# EAGLE board Qwiic MP3-Panel (EAGLE 9.0.0), part 1 of 3
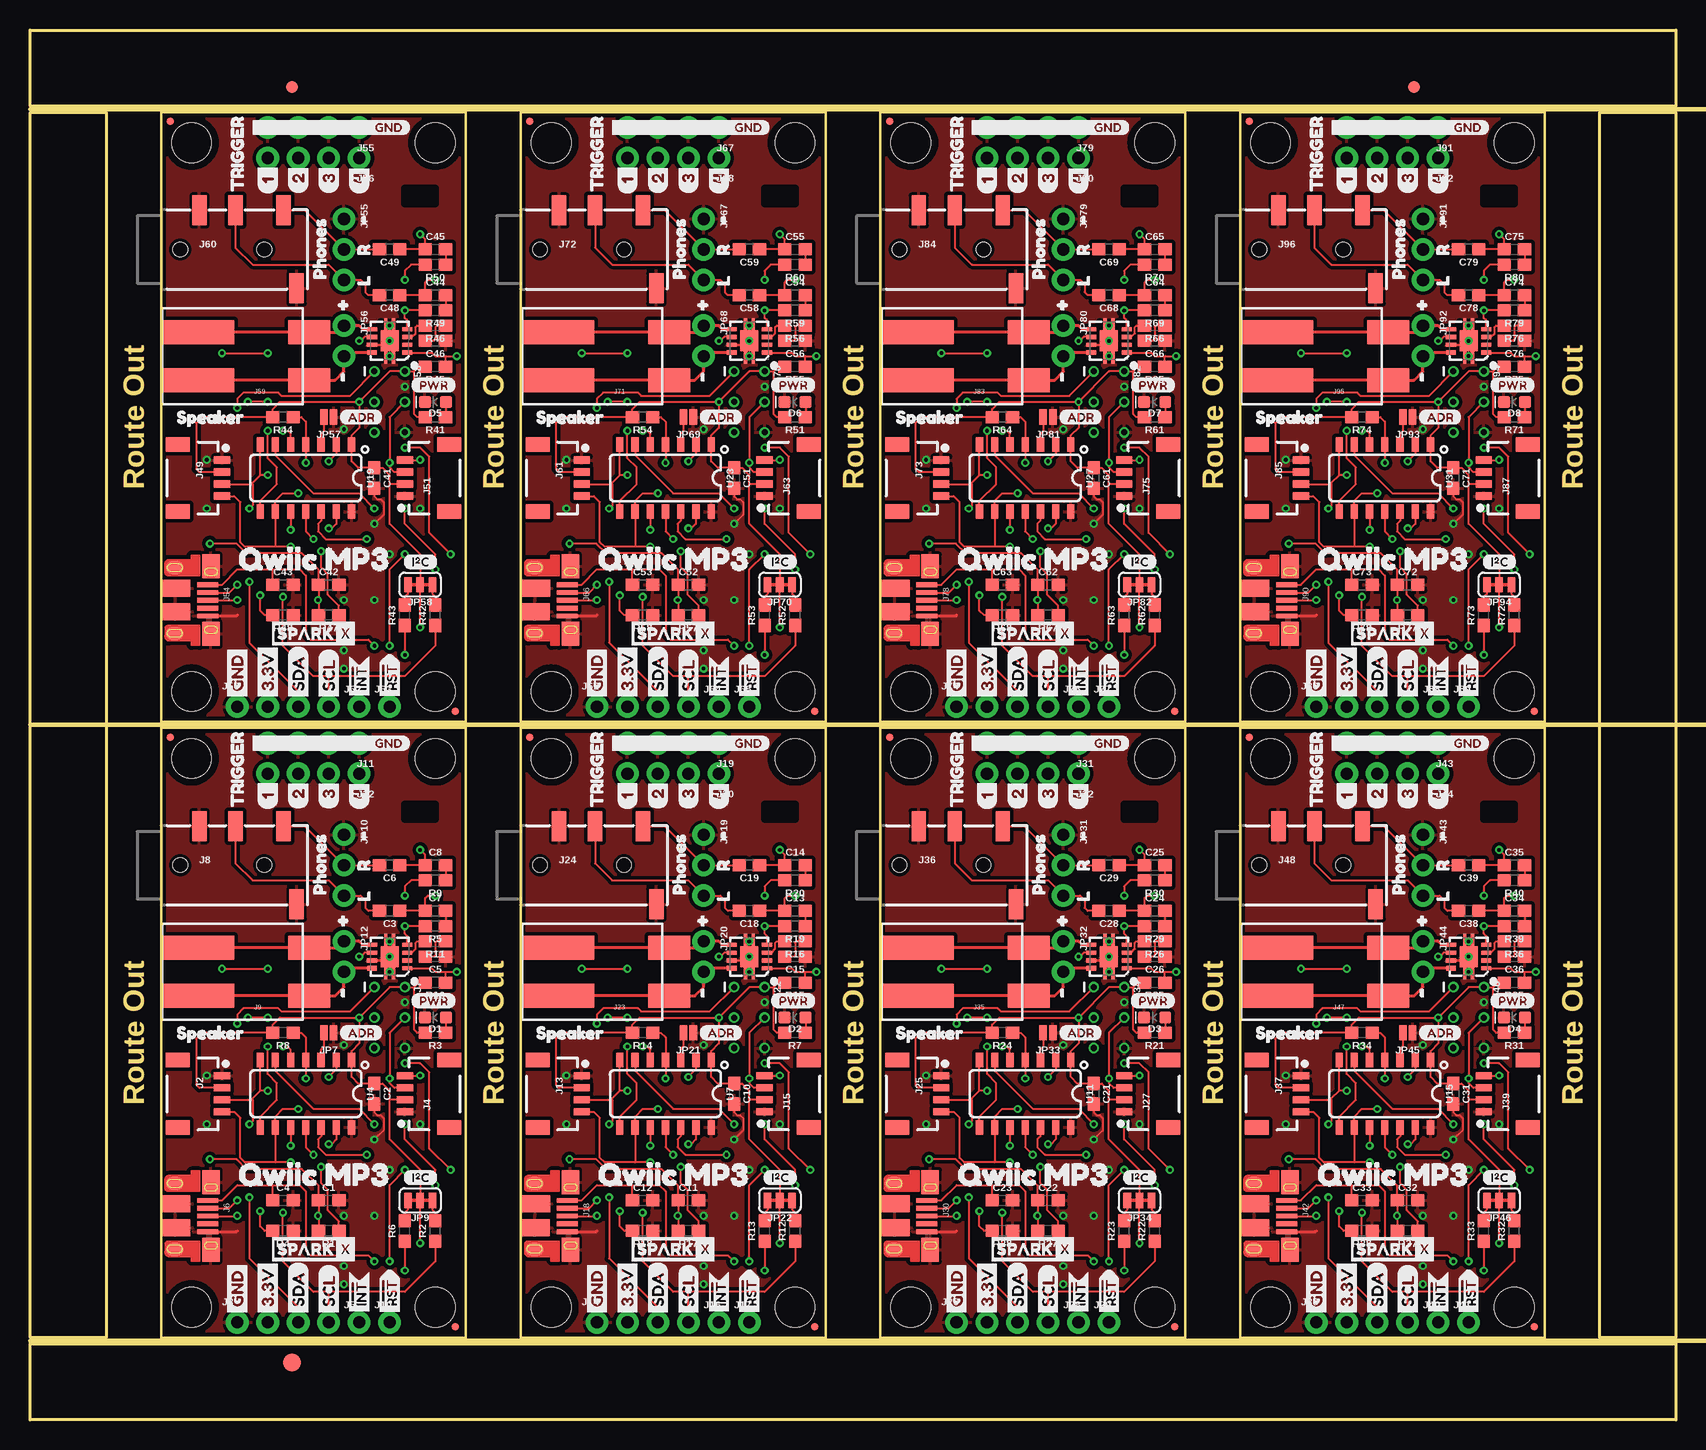
[diagram p0: board, top side]
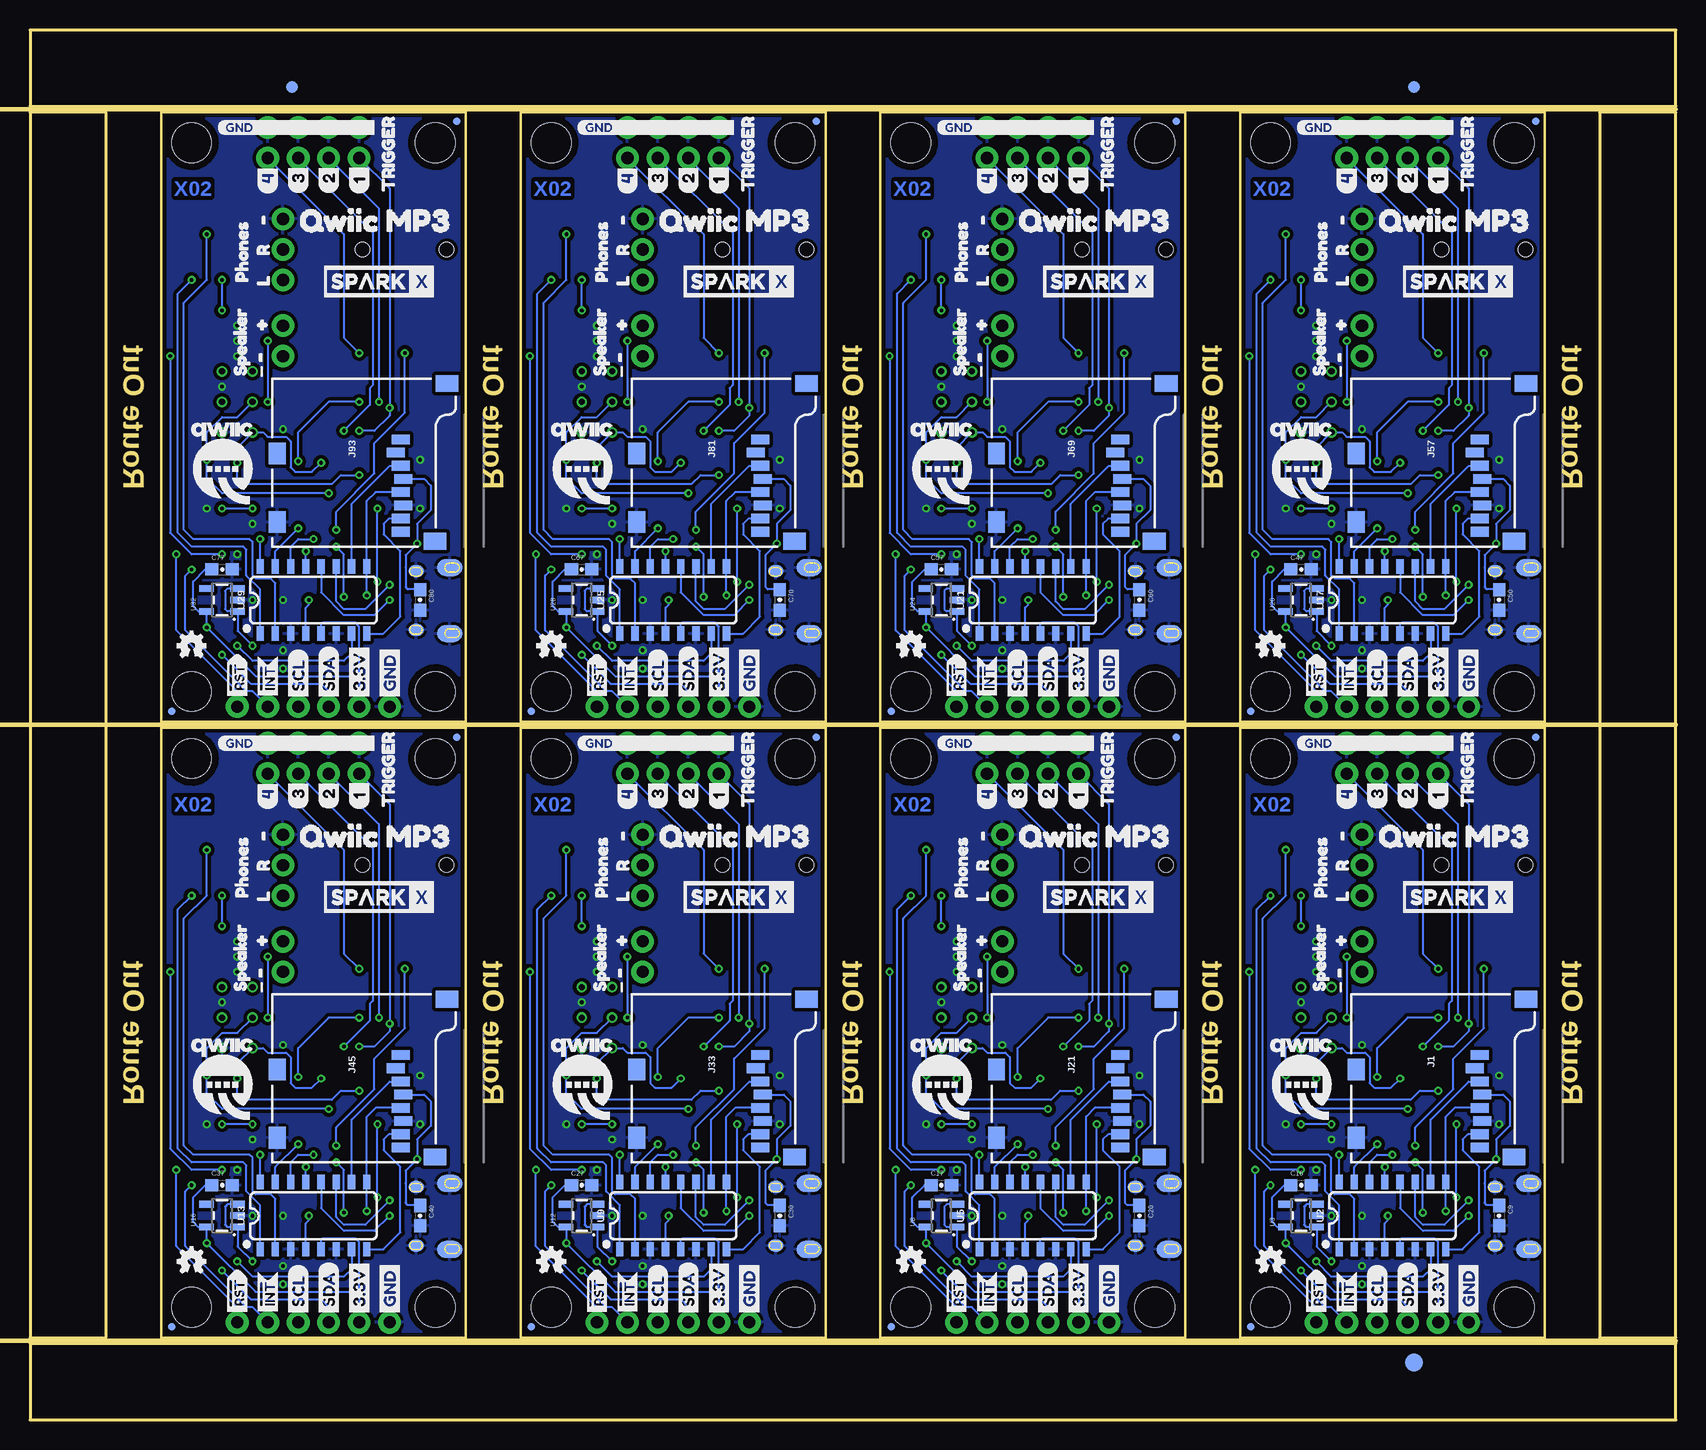
[diagram p1: board, bottom side, seen from below]

Size 137.16 x 115.82 mm. Coordinates in mm from the lower left corner, seen from the top.
Outline: 10.92,6.86 10.92,57.66 36.32,57.66 36.32,6.86 10.92,6.86
Outline: 40.89,6.86 40.89,57.66 66.29,57.66 66.29,6.86 40.89,6.86
Outline: 70.87,6.86 70.87,57.66 96.27,57.66 96.27,6.86 70.87,6.86
Outline: 100.84,6.86 100.84,57.66 126.24,57.66 126.24,6.86 100.84,6.86
Outline: 10.92,58.17 10.92,108.97 36.32,108.97 36.32,58.17 10.92,58.17
Outline: 40.89,58.17 40.89,108.97 66.29,108.97 66.29,58.17 40.89,58.17
Outline: 70.87,58.17 70.87,108.97 96.27,108.97 96.27,58.17 70.87,58.17
Outline: 100.84,58.17 100.84,108.97 126.24,108.97 126.24,58.17 100.84,58.17
Outline: 0,6.35 137.16,6.35 137.16,0 0,0 0,6.35
Outline: 130.81,108.97 137.16,108.97 137.16,6.86 130.81,6.86 130.81,108.97
Outline: 0,115.82 137.16,115.82 137.16,109.47 0,109.47 0,115.82
Outline: 0,108.97 6.35,108.97 6.35,6.86 0,6.86 0,108.97
Copper layers (1*16): Top 0.035mm / dielectric 1.5mm / Bottom 0.035mm
Design rules "SparkFun-2-layer-PCBWay-LIMIT": minimum track width 6mil, minimum drill 0.3mm, track to track 6mil, track to pad 6mil, pad to pad 6mil, via to via 6mil, smd to smd 6mil, copper to edge 6mil, drill to drill 6mil, minimum pad ring 7mil, minimum via ring 7mil, stop-mask expansion 4mil, vias tented up to drill 25mil, thermal gap 10mil
tRestrict: area 31.2,50 to 33.8,51.3; area 61.2,50 to 63.8,51.3; area 91.2,50 to 93.7,51.3; area 121.2,50 to 123.7,51.3; area 31.2,101.3 to 33.8,102.6; area 61.2,101.3 to 63.8,102.6; area 91.2,101.3 to 93.7,102.6; area 121.2,101.3 to 123.7,102.6
Milling: 3 lines

## Footprints (pad centres in the part's own frame; a part is rotated, then mirrored left to right if it is on the bottom)
0603 = smd 1.1 x 1: 1 -0.85,0; 2 0.85,0
0603-CAP = smd 1.1 x 1: 1 -0.85,0; 2 0.85,0
LED-0603 = smd 1 x 1: A -0.877,0; C 0.877,0
FIDUCIAL-1X2 = smd 1 x 1: 1 0,0
FIDUCIAL-1.5X3 = smd 1.5 x 1.5: 1 0,0
MICRO-SD-SOCKET = smd 1.8 x 1.4: CD1 -2.05,0.4; CD2 -7.75,0.4 | smd 0.8 x 1.5: CS -7.84,10.3; DI -6.74,10.7; DO -2.34,10.7; GND -3.44,10.9; RSV1 -8.94,10.7; RSV2 -1.24,10.7; SCLK -4.54,10.7; VCC -5.64,10.9 | smd 1.4 x 1.9: GND1 -13.6,14.55; GND3 -0.45,13.55
1X04_1MM_RA = smd 0.6 x 1.35: 1 -1.5,0; 2 -0.5,0; 3 0.5,0; 4 1.5,0 | smd 1.2 x 2: NC1 2.8,-3.675; NC2 -2.8,-3.675
1X04_NO_SILK = drill 1.016 pad 1.88: 1 0,0; 2 2.54,0; 3 5.08,0; 4 7.62,0
1X01_NO_SILK = drill 1.016 pad 1.88: 1 0,0
USB-MICROB-PTH-MILL = smd 0.4 x 1.75: D+ 0.031,1.331; D- -0.619,1.331; GND 1.331,1.331; ID 0.681,1.331; VBUS -1.269,1.331 | smd 2 x 1.46: SHIELD -2.794,1.606; SHIELD2 2.831,1.606 | smd 1.425 x 2.5: SHIELD3 -0.979,-1.349; SHIELD4 0.996,-1.352 | smd 1.4 x 2.1 bottom: SHIELD5 -2.7,-1.2; SHIELD7 2.8,-1.2 | smd 1.1 x 1.5: SHIELD6 2.8,-1.4; SHIELD8 -2.7,-1.4 | smd 1 x 1.3 bottom: SHIELD9 -2.4,1.6; SHIELD10 2.5,1.6
2X3_TEST_POINTS = drill 0.508: 1 -2.54,-1.27; 2 -2.54,1.27; 3 0,-1.27; 4 0,1.27; 5 2.54,-1.27; 6 2.54,1.27
AUDIO_JACK_3.5MM_TRRS_SMD_RA = smd 1.2 x 2.5: EARTH 11.3,-3.25; RING1 6.2,3.25; RING2 3.2,3.25; TIP 10.2,3.25 | hole 1.2: 1.6,0; 8.6,0
1X02_POKEHOME = smd 3.5 x 2: P1 5.25,2; P2 5.25,-2 | smd 6 x 2: P3 -4,2; P4 -4,-2
MICRO-FIDUCIAL = smd 0.635 x 0.635: 1 0,0
STAND-OFF = hole 3.302: 0,0
SMT-JUMPER_2_NO_NO-SILK = smd 0.635 x 1.27: 1 -0.406,0; 2 0.406,0
SMT-JUMPER_3_2-NC_TRACE_SILK = smd 0.635 x 1.27: 1 -1.016,0; 2 0,0; 3 1.016,0
1X03_NO_SILK = drill 1.016 pad 1.88: 1 0,0; 2 2.54,0; 3 5.08,0
1X02_NO_SILK = drill 1.016 pad 1.88: 1 0,0; 2 2.54,0
QFN-8_PAD = smd 0.35 x 0.85: 1 -0.975,-1.475; 2 -0.325,-1.475; 3 0.325,-1.475; 4 0.975,-1.475; 5 0.975,1.475; 6 0.325,1.475; 7 -0.325,1.475; 8 -0.975,1.475 | smd 1.75 x 1.5: 9 0,0 | smd 1.025 x 0.28: 10 -1.387,-0.325; 11 1.387,-0.325; 12 1.387,0.325; 13 -1.387,0.325
SO16 = smd 0.6 x 1.2: 1 -4.445,-2.8; 2 -3.175,-2.8; 3 -1.905,-2.8; 4 -0.635,-2.8; 5 0.635,-2.8; 6 1.905,-2.8; 7 3.175,-2.8; 8 4.445,-2.8; 9 4.445,2.8; 10 3.175,2.8; 11 1.905,2.8; 12 0.635,2.8; 13 -0.635,2.8; 14 -1.905,2.8; 15 -3.175,2.8; 16 -4.445,2.8
SOT23-5 = smd 0.55 x 1.2: 1 -0.95,-1.3; 2 0,-1.3; 3 0.95,-1.3; 4 0.95,1.3; 5 -0.95,1.3
SO14 = smd 0.6 x 1.2: 1 -3.175,-2.8; 2 -1.905,-2.8; 3 -0.635,-2.8; 4 0.635,-2.8; 5 1.905,-2.8; 6 3.175,-2.8; 7 4.445,-2.8; 8 4.445,2.8; 9 3.175,2.8; 10 1.905,2.8; 11 0.635,2.8; 12 -0.635,2.8; 13 -1.905,2.8; 14 -3.175,2.8

## Placement (x,y rotation side)
C1  10uF  [0603]  24.89,18.29 0 top
C2  0.1uF  [0603]  28.7,27.18 270 top
C3  10uF  [0603]  29.97,42.42 180 top
C4  1.0uF  [0603]  21.08,18.29 0 top
C5  1.0uF  [0603]  33.78,38.61 180 top
C6  10uF  [0603]  29.97,46.23 180 top
C7  0.1uF  [0603]  33.78,42.42 0 top
C8  0.1uF  [0603]  33.78,46.23 0 top
C9  1.0uF  [0603-CAP]  14.73,17.02 270 bottom
C10  0.1uF  [0603]  58.67,27.18 270 top
C11  10uF  [0603]  54.86,18.29 0 top
C12  1.0uF  [0603]  51.05,18.29 0 top
C13  0.1uF  [0603]  63.75,42.42 0 top
C14  0.1uF  [0603]  63.75,46.23 0 top
C15  1.0uF  [0603]  63.75,38.61 180 top
C16  1.0uF  [0603-CAP]  31.24,19.56 0 bottom
C17  1.0uF  [0603-CAP]  61.21,19.56 0 bottom
C18  10uF  [0603]  59.94,42.42 180 top
C19  10uF  [0603]  59.94,46.23 180 top
C20  1.0uF  [0603-CAP]  44.7,17.02 270 bottom
C21  0.1uF  [0603]  88.65,27.18 270 top
C22  10uF  [0603]  84.84,18.29 0 top
C23  1.0uF  [0603]  81.03,18.29 0 top
C24  0.1uF  [0603]  93.73,42.42 0 top
C25  0.1uF  [0603]  93.73,46.23 0 top
C26  1.0uF  [0603]  93.73,38.61 180 top
C27  1.0uF  [0603-CAP]  91.19,19.56 0 bottom
C28  10uF  [0603]  89.92,42.42 180 top
C29  10uF  [0603]  89.92,46.23 180 top
C30  1.0uF  [0603-CAP]  74.68,17.02 270 bottom
C31  0.1uF  [0603]  118.62,27.18 270 top
C32  10uF  [0603]  114.81,18.29 0 top
C33  1.0uF  [0603]  111,18.29 0 top
C34  0.1uF  [0603]  123.7,42.42 0 top
C35  0.1uF  [0603]  123.7,46.23 0 top
C36  1.0uF  [0603]  123.7,38.61 180 top
C37  1.0uF  [0603-CAP]  121.16,19.56 0 bottom
C38  10uF  [0603]  119.89,42.42 180 top
C39  10uF  [0603]  119.89,46.23 180 top
C40  1.0uF  [0603-CAP]  104.65,17.02 270 bottom
C41  0.1uF  [0603]  28.7,78.49 270 top
C42  10uF  [0603]  24.89,69.6 0 top
C43  1.0uF  [0603]  21.08,69.6 0 top
C44  0.1uF  [0603]  33.78,93.73 0 top
C45  0.1uF  [0603]  33.78,97.54 0 top
C46  1.0uF  [0603]  33.78,89.92 180 top
C47  1.0uF  [0603-CAP]  31.24,70.87 0 bottom
C48  10uF  [0603]  29.97,93.73 180 top
C49  10uF  [0603]  29.97,97.54 180 top
C50  1.0uF  [0603-CAP]  14.73,68.33 270 bottom
C51  0.1uF  [0603]  58.67,78.49 270 top
C52  10uF  [0603]  54.86,69.6 0 top
C53  1.0uF  [0603]  51.05,69.6 0 top
C54  0.1uF  [0603]  63.75,93.73 0 top
C55  0.1uF  [0603]  63.75,97.54 0 top
C56  1.0uF  [0603]  63.75,89.92 180 top
C57  1.0uF  [0603-CAP]  61.21,70.87 0 bottom
C58  10uF  [0603]  59.94,93.73 180 top
C59  10uF  [0603]  59.94,97.54 180 top
C60  1.0uF  [0603-CAP]  44.7,68.33 270 bottom
C61  0.1uF  [0603]  88.65,78.49 270 top
C62  10uF  [0603]  84.84,69.6 0 top
C63  1.0uF  [0603]  81.03,69.6 0 top
C64  0.1uF  [0603]  93.73,93.73 0 top
C65  0.1uF  [0603]  93.73,97.54 0 top
C66  1.0uF  [0603]  93.73,89.92 180 top
C67  1.0uF  [0603-CAP]  91.19,70.87 0 bottom
C68  10uF  [0603]  89.92,93.73 180 top
C69  10uF  [0603]  89.92,97.54 180 top
C70  1.0uF  [0603-CAP]  74.68,68.33 270 bottom
C71  0.1uF  [0603]  118.62,78.49 270 top
C72  10uF  [0603]  114.81,69.6 0 top
C73  1.0uF  [0603]  111,69.6 0 top
C74  0.1uF  [0603]  123.7,93.73 0 top
C75  0.1uF  [0603]  123.7,97.54 0 top
C76  1.0uF  [0603]  123.7,89.92 180 top
C77  1.0uF  [0603-CAP]  121.16,70.87 0 bottom
C78  10uF  [0603]  119.89,93.73 180 top
C79  10uF  [0603]  119.89,97.54 180 top
C80  1.0uF  [0603-CAP]  104.65,68.33 270 bottom
D1  RED  [LED-0603]  33.78,33.53 180 top
D2  RED  [LED-0603]  63.75,33.53 180 top
D3  RED  [LED-0603]  93.73,33.53 180 top
D4  RED  [LED-0603]  123.7,33.53 180 top
D5  RED  [LED-0603]  33.78,84.84 180 top
D6  RED  [LED-0603]  63.75,84.84 180 top
D7  RED  [LED-0603]  93.73,84.84 180 top
D8  RED  [LED-0603]  123.7,84.84 180 top
E$1  [FIDUCIAL-1X2]  21.84,111.06 0 top
E$2  [FIDUCIAL-1X2]  21.84,111.06 0 bottom
E$3  [FIDUCIAL-1X2]  115.32,111.06 0 top
E$4  [FIDUCIAL-1X2]  115.32,111.06 0 bottom
E$5  [FIDUCIAL-1.5X3]  21.84,4.76 0 top
E$6  [FIDUCIAL-1.5X3]  21.84,4.76 0 bottom
J1  MICRO-SD  [MICRO-SD-SOCKET]  27.05,21.46 270 bottom
J2  [1X04_1MM_RA]  16,27.18 270 top
J3  PTH  [1X04_NO_SILK]  17.27,8.13 0 top
J4  [1X04_1MM_RA]  31.24,27.18 90 top
J5  [1X01_NO_SILK]  27.43,8.13 0 top
J6  [USB-MICROB-PTH-MILL]  13.46,17.02 270 top
J7  ISP  [2X3_TEST_POINTS]  29.97,33.53 270 top
J8  3.5mm Audio  [AUDIO_JACK_3.5MM_TRRS_SMD_RA]  10.92,46.23 0 top
J9  Poke-Home  [1X02_POKEHOME]  18.03,37.34 0 top
J10  [1X01_NO_SILK]  29.97,8.13 0 top
J11  [1X04_NO_SILK]  27.43,56.39 180 top
J12  [1X04_NO_SILK]  27.43,53.85 180 top
J13  [1X04_1MM_RA]  45.97,27.18 270 top
J14  PTH  [1X04_NO_SILK]  47.24,8.13 0 top
J15  [1X04_1MM_RA]  61.21,27.18 90 top
J16  [1X01_NO_SILK]  57.4,8.13 0 top
J17  [1X01_NO_SILK]  59.94,8.13 0 top
J18  [USB-MICROB-PTH-MILL]  43.43,17.02 270 top
J19  [1X04_NO_SILK]  57.4,56.39 180 top
J20  [1X04_NO_SILK]  57.4,53.85 180 top
J21  MICRO-SD  [MICRO-SD-SOCKET]  57.02,21.46 270 bottom
J22  ISP  [2X3_TEST_POINTS]  59.94,33.53 270 top
J23  Poke-Home  [1X02_POKEHOME]  48.01,37.34 0 top
J24  3.5mm Audio  [AUDIO_JACK_3.5MM_TRRS_SMD_RA]  40.89,46.23 0 top
J25  [1X04_1MM_RA]  75.95,27.18 270 top
J26  PTH  [1X04_NO_SILK]  77.22,8.13 0 top
J27  [1X04_1MM_RA]  91.19,27.18 90 top
J28  [1X01_NO_SILK]  87.38,8.13 0 top
J29  [1X01_NO_SILK]  89.92,8.13 0 top
J30  [USB-MICROB-PTH-MILL]  73.41,17.02 270 top
J31  [1X04_NO_SILK]  87.38,56.39 180 top
J32  [1X04_NO_SILK]  87.38,53.85 180 top
J33  MICRO-SD  [MICRO-SD-SOCKET]  86.99,21.46 270 bottom
J34  ISP  [2X3_TEST_POINTS]  89.92,33.53 270 top
J35  Poke-Home  [1X02_POKEHOME]  77.98,37.34 0 top
J36  3.5mm Audio  [AUDIO_JACK_3.5MM_TRRS_SMD_RA]  70.87,46.23 0 top
J37  [1X04_1MM_RA]  105.92,27.18 270 top
J38  PTH  [1X04_NO_SILK]  107.19,8.13 0 top
J39  [1X04_1MM_RA]  121.16,27.18 90 top
J40  [1X01_NO_SILK]  117.35,8.13 0 top
J41  [1X01_NO_SILK]  119.89,8.13 0 top
J42  [USB-MICROB-PTH-MILL]  103.38,17.02 270 top
J43  [1X04_NO_SILK]  117.35,56.39 180 top
J44  [1X04_NO_SILK]  117.35,53.85 180 top
J45  MICRO-SD  [MICRO-SD-SOCKET]  116.97,21.46 270 bottom
J46  ISP  [2X3_TEST_POINTS]  119.89,33.53 270 top
J47  Poke-Home  [1X02_POKEHOME]  107.95,37.34 0 top
J48  3.5mm Audio  [AUDIO_JACK_3.5MM_TRRS_SMD_RA]  100.84,46.23 0 top
J49  [1X04_1MM_RA]  16,78.49 270 top
J50  PTH  [1X04_NO_SILK]  17.27,59.44 0 top
J51  [1X04_1MM_RA]  31.24,78.49 90 top
J52  [1X01_NO_SILK]  27.43,59.44 0 top
J53  [1X01_NO_SILK]  29.97,59.44 0 top
J54  [USB-MICROB-PTH-MILL]  13.46,68.33 270 top
J55  [1X04_NO_SILK]  27.43,107.7 180 top
J56  [1X04_NO_SILK]  27.43,105.16 180 top
J57  MICRO-SD  [MICRO-SD-SOCKET]  27.05,72.77 270 bottom
J58  ISP  [2X3_TEST_POINTS]  29.97,84.84 270 top
J59  Poke-Home  [1X02_POKEHOME]  18.03,88.65 0 top
J60  3.5mm Audio  [AUDIO_JACK_3.5MM_TRRS_SMD_RA]  10.92,97.54 0 top
J61  [1X04_1MM_RA]  45.97,78.49 270 top
J62  PTH  [1X04_NO_SILK]  47.24,59.44 0 top
J63  [1X04_1MM_RA]  61.21,78.49 90 top
J64  [1X01_NO_SILK]  57.4,59.44 0 top
J65  [1X01_NO_SILK]  59.94,59.44 0 top
J66  [USB-MICROB-PTH-MILL]  43.43,68.33 270 top
J67  [1X04_NO_SILK]  57.4,107.7 180 top
J68  [1X04_NO_SILK]  57.4,105.16 180 top
J69  MICRO-SD  [MICRO-SD-SOCKET]  57.02,72.77 270 bottom
J70  ISP  [2X3_TEST_POINTS]  59.94,84.84 270 top
J71  Poke-Home  [1X02_POKEHOME]  48.01,88.65 0 top
J72  3.5mm Audio  [AUDIO_JACK_3.5MM_TRRS_SMD_RA]  40.89,97.54 0 top
J73  [1X04_1MM_RA]  75.95,78.49 270 top
J74  PTH  [1X04_NO_SILK]  77.22,59.44 0 top
J75  [1X04_1MM_RA]  91.19,78.49 90 top
J76  [1X01_NO_SILK]  87.38,59.44 0 top
J77  [1X01_NO_SILK]  89.92,59.44 0 top
J78  [USB-MICROB-PTH-MILL]  73.41,68.33 270 top
J79  [1X04_NO_SILK]  87.38,107.7 180 top
J80  [1X04_NO_SILK]  87.38,105.16 180 top
J81  MICRO-SD  [MICRO-SD-SOCKET]  86.99,72.77 270 bottom
J82  ISP  [2X3_TEST_POINTS]  89.92,84.84 270 top
J83  Poke-Home  [1X02_POKEHOME]  77.98,88.65 0 top
J84  3.5mm Audio  [AUDIO_JACK_3.5MM_TRRS_SMD_RA]  70.87,97.54 0 top
J85  [1X04_1MM_RA]  105.92,78.49 270 top
J86  PTH  [1X04_NO_SILK]  107.19,59.44 0 top
J87  [1X04_1MM_RA]  121.16,78.49 90 top
J88  [1X01_NO_SILK]  117.35,59.44 0 top
J89  [1X01_NO_SILK]  119.89,59.44 0 top
J90  [USB-MICROB-PTH-MILL]  103.38,68.33 270 top
J91  [1X04_NO_SILK]  117.35,107.7 180 top
J92  [1X04_NO_SILK]  117.35,105.16 180 top
J93  MICRO-SD  [MICRO-SD-SOCKET]  116.97,72.77 270 bottom
J94  ISP  [2X3_TEST_POINTS]  119.89,84.84 270 top
J95  Poke-Home  [1X02_POKEHOME]  107.95,88.65 0 top
J96  3.5mm Audio  [AUDIO_JACK_3.5MM_TRRS_SMD_RA]  100.84,97.54 0 top
JP1  FIDUCIALUFIDUCIAL  [MICRO-FIDUCIAL]  11.68,56.9 0 bottom
JP2  FIDUCIALUFIDUCIAL  [MICRO-FIDUCIAL]  35.43,7.75 0 top
JP3  STAND-OFF  [STAND-OFF]  13.46,55.12 0 top
JP4  STAND-OFF  [STAND-OFF]  33.78,55.12 0 top
JP5  FIDUCIALUFIDUCIAL  [MICRO-FIDUCIAL]  35.43,7.75 0 bottom
JP6  FIDUCIALUFIDUCIAL  [MICRO-FIDUCIAL]  11.68,56.9 0 top
JP7  ADR  [SMT-JUMPER_2_NO_NO-SILK]  24.89,32.26 180 top
JP8  STAND-OFF  [STAND-OFF]  43.43,55.12 0 top
JP9  [SMT-JUMPER_3_2-NC_TRACE_SILK]  32.51,18.29 180 top
JP10  PTH  [1X03_NO_SILK]  26.16,48.77 270 top
JP11  STAND-OFF  [STAND-OFF]  13.46,9.4 0 top
JP12  PTH  [1X02_NO_SILK]  26.16,39.88 270 top
JP13  STAND-OFF  [STAND-OFF]  33.78,9.4 0 top
JP14  STAND-OFF  [STAND-OFF]  63.75,55.12 0 top
JP15  FIDUCIALUFIDUCIAL  [MICRO-FIDUCIAL]  65.41,7.75 0 top
JP16  FIDUCIALUFIDUCIAL  [MICRO-FIDUCIAL]  41.66,56.9 0 top
JP17  FIDUCIALUFIDUCIAL  [MICRO-FIDUCIAL]  41.66,56.9 0 bottom
JP18  FIDUCIALUFIDUCIAL  [MICRO-FIDUCIAL]  65.41,7.75 0 bottom
JP19  PTH  [1X03_NO_SILK]  56.13,48.77 270 top
JP20  PTH  [1X02_NO_SILK]  56.13,39.88 270 top
JP21  ADR  [SMT-JUMPER_2_NO_NO-SILK]  54.86,32.26 180 top
JP22  [SMT-JUMPER_3_2-NC_TRACE_SILK]  62.48,18.29 180 top
JP23  STAND-OFF  [STAND-OFF]  43.43,9.4 0 top
JP24  STAND-OFF  [STAND-OFF]  63.75,9.4 0 top
JP25  STAND-OFF  [STAND-OFF]  73.41,55.12 0 top
JP26  STAND-OFF  [STAND-OFF]  93.73,55.12 0 top
JP27  FIDUCIALUFIDUCIAL  [MICRO-FIDUCIAL]  95.38,7.75 0 top
JP28  FIDUCIALUFIDUCIAL  [MICRO-FIDUCIAL]  71.63,56.9 0 top
JP29  FIDUCIALUFIDUCIAL  [MICRO-FIDUCIAL]  71.63,56.9 0 bottom
JP30  FIDUCIALUFIDUCIAL  [MICRO-FIDUCIAL]  95.38,7.75 0 bottom
JP31  PTH  [1X03_NO_SILK]  86.11,48.77 270 top
JP32  PTH  [1X02_NO_SILK]  86.11,39.88 270 top
JP33  ADR  [SMT-JUMPER_2_NO_NO-SILK]  84.84,32.26 180 top
JP34  [SMT-JUMPER_3_2-NC_TRACE_SILK]  92.46,18.29 180 top
JP35  STAND-OFF  [STAND-OFF]  73.41,9.4 0 top
JP36  STAND-OFF  [STAND-OFF]  93.73,9.4 0 top
JP37  STAND-OFF  [STAND-OFF]  103.38,55.12 0 top
JP38  STAND-OFF  [STAND-OFF]  123.7,55.12 0 top
JP39  FIDUCIALUFIDUCIAL  [MICRO-FIDUCIAL]  125.35,7.75 0 top
JP40  FIDUCIALUFIDUCIAL  [MICRO-FIDUCIAL]  101.6,56.9 0 top
JP41  FIDUCIALUFIDUCIAL  [MICRO-FIDUCIAL]  101.6,56.9 0 bottom
JP42  FIDUCIALUFIDUCIAL  [MICRO-FIDUCIAL]  125.35,7.75 0 bottom
JP43  PTH  [1X03_NO_SILK]  116.08,48.77 270 top
JP44  PTH  [1X02_NO_SILK]  116.08,39.88 270 top
JP45  ADR  [SMT-JUMPER_2_NO_NO-SILK]  114.81,32.26 180 top
JP46  [SMT-JUMPER_3_2-NC_TRACE_SILK]  122.43,18.29 180 top
JP47  STAND-OFF  [STAND-OFF]  103.38,9.4 0 top
JP48  STAND-OFF  [STAND-OFF]  123.7,9.4 0 top
JP49  STAND-OFF  [STAND-OFF]  13.46,106.43 0 top
JP50  STAND-OFF  [STAND-OFF]  33.78,106.43 0 top
JP51  FIDUCIALUFIDUCIAL  [MICRO-FIDUCIAL]  35.43,59.05 0 top
JP52  FIDUCIALUFIDUCIAL  [MICRO-FIDUCIAL]  11.68,108.2 0 top
JP53  FIDUCIALUFIDUCIAL  [MICRO-FIDUCIAL]  11.68,108.2 0 bottom
JP54  FIDUCIALUFIDUCIAL  [MICRO-FIDUCIAL]  35.43,59.05 0 bottom
JP55  PTH  [1X03_NO_SILK]  26.16,100.08 270 top
JP56  PTH  [1X02_NO_SILK]  26.16,91.19 270 top
JP57  ADR  [SMT-JUMPER_2_NO_NO-SILK]  24.89,83.57 180 top
JP58  [SMT-JUMPER_3_2-NC_TRACE_SILK]  32.51,69.6 180 top
JP59  STAND-OFF  [STAND-OFF]  13.46,60.71 0 top
JP60  STAND-OFF  [STAND-OFF]  33.78,60.71 0 top
JP61  STAND-OFF  [STAND-OFF]  43.43,106.43 0 top
JP62  STAND-OFF  [STAND-OFF]  63.75,106.43 0 top
JP63  FIDUCIALUFIDUCIAL  [MICRO-FIDUCIAL]  65.41,59.05 0 top
JP64  FIDUCIALUFIDUCIAL  [MICRO-FIDUCIAL]  41.66,108.2 0 top
JP65  FIDUCIALUFIDUCIAL  [MICRO-FIDUCIAL]  41.66,108.2 0 bottom
JP66  FIDUCIALUFIDUCIAL  [MICRO-FIDUCIAL]  65.41,59.05 0 bottom
JP67  PTH  [1X03_NO_SILK]  56.13,100.08 270 top
JP68  PTH  [1X02_NO_SILK]  56.13,91.19 270 top
JP69  ADR  [SMT-JUMPER_2_NO_NO-SILK]  54.86,83.57 180 top
JP70  [SMT-JUMPER_3_2-NC_TRACE_SILK]  62.48,69.6 180 top
JP71  STAND-OFF  [STAND-OFF]  43.43,60.71 0 top
JP72  STAND-OFF  [STAND-OFF]  63.75,60.71 0 top
JP73  STAND-OFF  [STAND-OFF]  73.41,106.43 0 top
JP74  STAND-OFF  [STAND-OFF]  93.73,106.43 0 top
JP75  FIDUCIALUFIDUCIAL  [MICRO-FIDUCIAL]  95.38,59.05 0 top
JP76  FIDUCIALUFIDUCIAL  [MICRO-FIDUCIAL]  71.63,108.2 0 top
JP77  FIDUCIALUFIDUCIAL  [MICRO-FIDUCIAL]  71.63,108.2 0 bottom
JP78  FIDUCIALUFIDUCIAL  [MICRO-FIDUCIAL]  95.38,59.05 0 bottom
JP79  PTH  [1X03_NO_SILK]  86.11,100.08 270 top
JP80  PTH  [1X02_NO_SILK]  86.11,91.19 270 top
JP81  ADR  [SMT-JUMPER_2_NO_NO-SILK]  84.84,83.57 180 top
JP82  [SMT-JUMPER_3_2-NC_TRACE_SILK]  92.46,69.6 180 top
JP83  STAND-OFF  [STAND-OFF]  73.41,60.71 0 top
JP84  STAND-OFF  [STAND-OFF]  93.73,60.71 0 top
JP85  STAND-OFF  [STAND-OFF]  103.38,106.43 0 top
JP86  STAND-OFF  [STAND-OFF]  123.7,106.43 0 top
JP87  FIDUCIALUFIDUCIAL  [MICRO-FIDUCIAL]  125.35,59.05 0 top
JP88  FIDUCIALUFIDUCIAL  [MICRO-FIDUCIAL]  101.6,108.2 0 top
JP89  FIDUCIALUFIDUCIAL  [MICRO-FIDUCIAL]  101.6,108.2 0 bottom
JP90  FIDUCIALUFIDUCIAL  [MICRO-FIDUCIAL]  125.35,59.05 0 bottom
JP91  PTH  [1X03_NO_SILK]  116.08,100.08 270 top
JP92  PTH  [1X02_NO_SILK]  116.08,91.19 270 top
JP93  ADR  [SMT-JUMPER_2_NO_NO-SILK]  114.81,83.57 180 top
JP94  [SMT-JUMPER_3_2-NC_TRACE_SILK]  122.43,69.6 180 top
JP95  STAND-OFF  [STAND-OFF]  103.38,60.71 0 top
JP96  STAND-OFF  [STAND-OFF]  123.7,60.71 0 top
LOGO1  OSHW-LOGOMINI  [OSHW-LOGO-MINI]  33.78,13.21 0 bottom
LOGO2  OSHW-LOGOMINI  [OSHW-LOGO-MINI]  63.75,13.21 0 bottom
LOGO3  OSHW-LOGOMINI  [OSHW-LOGO-MINI]  93.73,13.21 0 bottom
LOGO4  OSHW-LOGOMINI  [OSHW-LOGO-MINI]  123.7,13.21 0 bottom
LOGO5  OSHW-LOGOMINI  [OSHW-LOGO-MINI]  33.78,64.52 0 bottom
LOGO6  OSHW-LOGOMINI  [OSHW-LOGO-MINI]  63.75,64.52 0 bottom
LOGO7  OSHW-LOGOMINI  [OSHW-LOGO-MINI]  93.73,64.52 0 bottom
LOGO8  OSHW-LOGOMINI  [OSHW-LOGO-MINI]  123.7,64.52 0 bottom
R1  10k  [0603]  24.89,15.75 180 top
R2  2.2k  [0603]  33.78,15.75 90 top
R3  1k  [0603]  33.78,32.26 180 top
R4  2.2k  [0603]  21.08,15.75 180 top
R5  10k  [0603]  33.78,41.15 180 top
R6  2.2k  [0603]  31.24,15.75 90 top
R7  1k  [0603]  63.75,32.26 180 top
R8  4.7k  [0603]  21.08,32.26 180 top
R9  10k  [0603]  33.78,44.96 180 top
R10  10k  [0603]  33.78,36.45 180 top
R11  100k  [0603]  33.78,39.88 180 top
R12  2.2k  [0603]  63.75,15.75 90 top
R13  2.2k  [0603]  61.21,15.75 90 top
R14  4.7k  [0603]  51.05,32.26 180 top
R15  10k  [0603]  63.75,36.45 180 top
R16  100k  [0603]  63.75,39.88 180 top
R17  10k  [0603]  54.86,15.75 180 top
R18  2.2k  [0603]  51.05,15.75 180 top
R19  10k  [0603]  63.75,41.15 180 top
R20  10k  [0603]  63.75,44.96 180 top
R21  1k  [0603]  93.73,32.26 180 top
R22  2.2k  [0603]  93.73,15.75 90 top
R23  2.2k  [0603]  91.19,15.75 90 top
R24  4.7k  [0603]  81.03,32.26 180 top
R25  10k  [0603]  93.73,36.45 180 top
R26  100k  [0603]  93.73,39.88 180 top
R27  10k  [0603]  84.84,15.75 180 top
R28  2.2k  [0603]  81.03,15.75 180 top
R29  10k  [0603]  93.73,41.15 180 top
R30  10k  [0603]  93.73,44.96 180 top
R31  1k  [0603]  123.7,32.26 180 top
R32  2.2k  [0603]  123.7,15.75 90 top
R33  2.2k  [0603]  121.16,15.75 90 top
R34  4.7k  [0603]  111,32.26 180 top
R35  10k  [0603]  123.7,36.45 180 top
R36  100k  [0603]  123.7,39.88 180 top
R37  10k  [0603]  114.81,15.75 180 top
R38  2.2k  [0603]  111,15.75 180 top
R39  10k  [0603]  123.7,41.15 180 top
R40  10k  [0603]  123.7,44.96 180 top
R41  1k  [0603]  33.78,83.57 180 top
R42  2.2k  [0603]  33.78,67.06 90 top
R43  2.2k  [0603]  31.24,67.06 90 top
R44  4.7k  [0603]  21.08,83.57 180 top
R45  10k  [0603]  33.78,87.76 180 top
R46  100k  [0603]  33.78,91.19 180 top
R47  10k  [0603]  24.89,67.06 180 top
R48  2.2k  [0603]  21.08,67.06 180 top
R49  10k  [0603]  33.78,92.46 180 top
R50  10k  [0603]  33.78,96.27 180 top
R51  1k  [0603]  63.75,83.57 180 top
R52  2.2k  [0603]  63.75,67.06 90 top
R53  2.2k  [0603]  61.21,67.06 90 top
R54  4.7k  [0603]  51.05,83.57 180 top
R55  10k  [0603]  63.75,87.76 180 top
R56  100k  [0603]  63.75,91.19 180 top
R57  10k  [0603]  54.86,67.06 180 top
R58  2.2k  [0603]  51.05,67.06 180 top
R59  10k  [0603]  63.75,92.46 180 top
R60  10k  [0603]  63.75,96.27 180 top
R61  1k  [0603]  93.73,83.57 180 top
R62  2.2k  [0603]  93.73,67.06 90 top
R63  2.2k  [0603]  91.19,67.06 90 top
R64  4.7k  [0603]  81.03,83.57 180 top
R65  10k  [0603]  93.73,87.76 180 top
R66  100k  [0603]  93.73,91.19 180 top
R67  10k  [0603]  84.84,67.06 180 top
R68  2.2k  [0603]  81.03,67.06 180 top
R69  10k  [0603]  93.73,92.46 180 top
R70  10k  [0603]  93.73,96.27 180 top
R71  1k  [0603]  123.7,83.57 180 top
R72  2.2k  [0603]  123.7,67.06 90 top
R73  2.2k  [0603]  121.16,67.06 90 top
R74  4.7k  [0603]  111,83.57 180 top
R75  10k  [0603]  123.7,87.76 180 top
R76  100k  [0603]  123.7,91.19 180 top
R77  10k  [0603]  114.81,67.06 180 top
R78  2.2k  [0603]  111,67.06 180 top
R79  10k  [0603]  123.7,92.46 180 top
R80  10k  [0603]  123.7,96.27 180 top
U1  TPA2005D1  [QFN-8_PAD]  29.97,38.61 90 top
U2  WT2003S  [SO16]  23.62,17.02 0 bottom
U3  AP2112-3.3V  [SOT23-5]  31.24,17.02 90 bottom
U4  ATTINY84-ARDUINO  [SO14]  23.62,27.18 180 top
U5  WT2003S  [SO16]  53.59,17.02 0 bottom
U6  TPA2005D1  [QFN-8_PAD]  59.94,38.61 90 top
U7  ATTINY84-ARDUINO  [SO14]  53.59,27.18 180 top
U8  AP2112-3.3V  [SOT23-5]  61.21,17.02 90 bottom
U9  WT2003S  [SO16]  83.57,17.02 0 bottom
U10  TPA2005D1  [QFN-8_PAD]  89.92,38.61 90 top
U11  ATTINY84-ARDUINO  [SO14]  83.57,27.18 180 top
U12  AP2112-3.3V  [SOT23-5]  91.19,17.02 90 bottom
U13  WT2003S  [SO16]  113.54,17.02 0 bottom
U14  TPA2005D1  [QFN-8_PAD]  119.89,38.61 90 top
U15  ATTINY84-ARDUINO  [SO14]  113.54,27.18 180 top
U16  AP2112-3.3V  [SOT23-5]  121.16,17.02 90 bottom
U17  WT2003S  [SO16]  23.62,68.33 0 bottom
U18  TPA2005D1  [QFN-8_PAD]  29.97,89.92 90 top
U19  ATTINY84-ARDUINO  [SO14]  23.62,78.49 180 top
U20  AP2112-3.3V  [SOT23-5]  31.24,68.33 90 bottom
U21  WT2003S  [SO16]  53.59,68.33 0 bottom
U22  TPA2005D1  [QFN-8_PAD]  59.94,89.92 90 top
U23  ATTINY84-ARDUINO  [SO14]  53.59,78.49 180 top
U24  AP2112-3.3V  [SOT23-5]  61.21,68.33 90 bottom
U25  WT2003S  [SO16]  83.57,68.33 0 bottom
U26  TPA2005D1  [QFN-8_PAD]  89.92,89.92 90 top
U27  ATTINY84-ARDUINO  [SO14]  83.57,78.49 180 top
U28  AP2112-3.3V  [SOT23-5]  91.19,68.33 90 bottom
U29  WT2003S  [SO16]  113.54,68.33 0 bottom
U30  TPA2005D1  [QFN-8_PAD]  119.89,89.92 90 top
U31  ATTINY84-ARDUINO  [SO14]  113.54,78.49 180 top
U32  AP2112-3.3V  [SOT23-5]  121.16,68.33 90 bottom
U$1  SPARKX-LOGO3  [SPARKX-SMALL]  23.62,14.22 0 top
U$2  SPARKX-LOGO4  [SPARKX-MEDIUM]  18.16,43.56 0 bottom
U$3  [GND1]  17.27,8.51 90 bottom
U$4  [3#3V2]  19.81,8.51 90 bottom
U$5  [SDA8]  22.35,8.51 90 bottom
U$6  [SCL9]  24.89,8.51 90 bottom
U$7  [RST#-[>]  29.97,8.38 90 top
U$8  [I_SUPER2_C-()-03]  31.12,20.19 0 top
U$9  [INT#-[<]  27.43,8.38 90 top
U$10  [#6]  27.56,47.12 90 top
U$11  [INT#-[<]  27.43,8.38 90 bottom
U$12  [#5]  25.91,40 90 top
U$13  [#6]  25.78,34.04 90 top
U$14  [SPEAKER1]  29.72,34.8 90 bottom
U$15  [PHONES0]  24.13,42.67 90 top
U$16  [RST#-[>]  29.97,8.38 90 bottom
U$17  [PWR-()-03]  31.75,34.92 0 top
U$18  [ADR-()-03]  25.78,32.26 0 top
U$19  [1_1]  19.81,50.8 90 top
U$20  [SPEAKER1]  11.3,32.26 0 top
U$21  [3#3V2]  19.81,8.51 90 top
U$22  [GND1]  17.27,8.51 90 top
U$23  [QWIIC_MP32]  15.75,20.45 0 top
U$24  [QWIIC_MP32]  26.42,48.64 0 bottom
U$25  [#6]  28.32,35.69 90 bottom
U$26  [SCL9]  24.89,8.51 90 top
U$27  [SDA8]  22.35,8.51 90 top
U$28  [#5]  28.07,38.35 90 bottom
U$29  [TRIGGER5]  17.27,50.16 90 top
U$30  SPARKX-LOGO4  [SPARKX-MEDIUM]  48.13,43.56 0 bottom
U$31  [43]  27.43,50.8 90 bottom
U$32  [21]  22.35,50.67 90 top
U$33  [32]  24.89,50.67 90 top
U$34  [43]  27.43,50.8 90 top
U$35  [GND0]  28.07,56.39 0 top
U$36  [32]  24.89,50.67 90 bottom
U$37  [L12]  27.81,42.29 90 top
U$38  [#6]  28.07,47.12 90 bottom
U$39  [R11]  27.81,44.83 90 bottom
U$40  [PHONES0]  29.59,42.42 90 bottom
U$41  [L12]  27.81,42.29 90 bottom
U$42  [21]  22.35,50.67 90 bottom
U$43  [R11]  27.81,44.83 90 top
U$44  [1_1]  19.81,50.8 90 bottom
U$45  [TRIGGER5]  17.4,50.16 90 bottom
U$46  [GND0]  31.62,56.39 0 bottom
U$47  [QWIIC-LOGO-MEDIUM]  31.24,28.45 0 bottom
U$48  SPARKX-LOGO3  [SPARKX-SMALL]  53.59,14.22 0 top
U$49  [3#3V2]  49.78,8.51 90 top
U$50  [GND1]  47.24,8.51 90 top
U$51  [SCL9]  54.86,8.51 90 top
U$52  [SDA8]  52.32,8.51 90 top
U$53  [GND1]  47.24,8.51 90 bottom
U$54  [3#3V2]  49.78,8.51 90 bottom
U$55  [SDA8]  52.32,8.51 90 bottom
U$56  [SCL9]  54.86,8.51 90 bottom
U$57  [I_SUPER2_C-()-03]  61.09,20.19 0 top
U$58  [INT#-[<]  57.4,8.38 90 top
U$59  [INT#-[<]  57.4,8.38 90 bottom
U$60  [RST#-[>]  59.94,8.38 90 top
U$61  [RST#-[>]  59.94,8.38 90 bottom
U$62  [PWR-()-03]  61.72,34.92 0 top
U$63  [ADR-()-03]  55.75,32.26 0 top
U$64  [TRIGGER5]  47.24,50.16 90 top
U$65  [21]  52.32,50.67 90 top
U$66  [32]  54.86,50.67 90 top
U$67  [43]  57.4,50.8 90 top
U$68  [#5]  55.88,40 90 top
U$69  [#6]  55.75,34.04 90 top
U$70  [1_1]  49.78,50.8 90 top
U$71  [GND0]  58.04,56.39 0 top
U$72  [L12]  57.78,42.29 90 top
U$73  [R11]  57.78,44.83 90 top
U$74  [#6]  57.53,47.12 90 top
U$75  [PHONES0]  54.1,42.67 90 top
U$76  [SPEAKER1]  41.28,32.26 0 top
U$77  [QWIIC_MP32]  45.72,20.45 0 top
U$78  [QWIIC_MP32]  56.39,48.64 0 bottom
U$79  [#6]  58.29,35.69 90 bottom
U$80  [#5]  58.04,38.35 90 bottom
U$81  [43]  57.4,50.8 90 bottom
U$82  [32]  54.86,50.67 90 bottom
U$83  [#6]  58.04,47.12 90 bottom
U$84  [R11]  57.78,44.83 90 bottom
U$85  [L12]  57.78,42.29 90 bottom
U$86  [21]  52.32,50.67 90 bottom
U$87  [1_1]  49.78,50.8 90 bottom
U$88  [TRIGGER5]  47.37,50.16 90 bottom
U$89  [GND0]  61.59,56.39 0 bottom
U$90  [PHONES0]  59.56,42.42 90 bottom
U$91  [SPEAKER1]  59.69,34.8 90 bottom
U$92  [QWIIC-LOGO-MEDIUM]  61.21,28.45 0 bottom
U$93  SPARKX-LOGO4  [SPARKX-MEDIUM]  78.11,43.56 0 bottom
U$94  SPARKX-LOGO3  [SPARKX-SMALL]  83.57,14.22 0 top
U$95  [3#3V2]  79.76,8.51 90 top
U$96  [GND1]  77.22,8.51 90 top
U$97  [SCL9]  84.84,8.51 90 top
U$98  [SDA8]  82.3,8.51 90 top
U$99  [GND1]  77.22,8.51 90 bottom
U$100  [3#3V2]  79.76,8.51 90 bottom
U$101  [SDA8]  82.3,8.51 90 bottom
U$102  [SCL9]  84.84,8.51 90 bottom
U$103  [I_SUPER2_C-()-03]  91.06,20.19 0 top
U$104  [INT#-[<]  87.38,8.38 90 top
U$105  [INT#-[<]  87.38,8.38 90 bottom
U$106  [RST#-[>]  89.92,8.38 90 top
U$107  [RST#-[>]  89.92,8.38 90 bottom
U$108  [PWR-()-03]  91.69,34.92 0 top
U$109  [ADR-()-03]  85.72,32.26 0 top
U$110  [TRIGGER5]  77.22,50.16 90 top
U$111  [21]  82.3,50.67 90 top
U$112  [32]  84.84,50.67 90 top
U$113  [43]  87.38,50.8 90 top
U$114  [#5]  85.85,40 90 top
U$115  [#6]  85.72,34.04 90 top
U$116  [1_1]  79.76,50.8 90 top
U$117  [GND0]  88.01,56.39 0 top
U$118  [L12]  87.76,42.29 90 top
U$119  [R11]  87.76,44.83 90 top
U$120  [#6]  87.5,47.12 90 top
U$121  [PHONES0]  84.07,42.67 90 top
U$122  [SPEAKER1]  71.25,32.26 0 top
U$123  [QWIIC_MP32]  75.69,20.45 0 top
U$124  [QWIIC_MP32]  86.36,48.64 0 bottom
U$125  [#6]  88.27,35.69 90 bottom
U$126  [#5]  88.01,38.35 90 bottom
U$127  [43]  87.38,50.8 90 bottom
U$128  [32]  84.84,50.67 90 bottom
U$129  [#6]  88.01,47.12 90 bottom
U$130  [R11]  87.76,44.83 90 bottom
U$131  [L12]  87.76,42.29 90 bottom
U$132  [21]  82.3,50.67 90 bottom
U$133  [1_1]  79.76,50.8 90 bottom
U$134  [TRIGGER5]  77.34,50.16 90 bottom
U$135  [GND0]  91.57,56.39 0 bottom
U$136  [PHONES0]  89.53,42.42 90 bottom
U$137  [SPEAKER1]  89.66,34.8 90 bottom
U$138  [QWIIC-LOGO-MEDIUM]  91.19,28.45 0 bottom
U$139  SPARKX-LOGO4  [SPARKX-MEDIUM]  108.08,43.56 0 bottom
U$140  SPARKX-LOGO3  [SPARKX-SMALL]  113.54,14.22 0 top
U$141  [3#3V2]  109.73,8.51 90 top
U$142  [GND1]  107.19,8.51 90 top
U$143  [SCL9]  114.81,8.51 90 top
U$144  [SDA8]  112.27,8.51 90 top
U$145  [GND1]  107.19,8.51 90 bottom
U$146  [3#3V2]  109.73,8.51 90 bottom
U$147  [SDA8]  112.27,8.51 90 bottom
U$148  [SCL9]  114.81,8.51 90 bottom
U$149  [I_SUPER2_C-()-03]  121.03,20.19 0 top
U$150  [INT#-[<]  117.35,8.38 90 top
U$151  [INT#-[<]  117.35,8.38 90 bottom
U$152  [RST#-[>]  119.89,8.38 90 top
U$153  [RST#-[>]  119.89,8.38 90 bottom
U$154  [PWR-()-03]  121.67,34.92 0 top
U$155  [ADR-()-03]  115.7,32.26 0 top
U$156  [TRIGGER5]  107.19,50.16 90 top
U$157  [21]  112.27,50.67 90 top
U$158  [32]  114.81,50.67 90 top
U$159  [43]  117.35,50.8 90 top
U$160  [#5]  115.82,40 90 top
U$161  [#6]  115.7,34.04 90 top
U$162  [1_1]  109.73,50.8 90 top
U$163  [GND0]  117.98,56.39 0 top
U$164  [L12]  117.73,42.29 90 top
U$165  [R11]  117.73,44.83 90 top
U$166  [#6]  117.47,47.12 90 top
U$167  [PHONES0]  114.05,42.67 90 top
U$168  [SPEAKER1]  101.22,32.26 0 top
U$169  [QWIIC_MP32]  105.66,20.45 0 top
U$170  [QWIIC_MP32]  116.33,48.64 0 bottom
U$171  [#6]  118.24,35.69 90 bottom
U$172  [#5]  117.98,38.35 90 bottom
U$173  [43]  117.35,50.8 90 bottom
U$174  [32]  114.81,50.67 90 bottom
U$175  [#6]  117.98,47.12 90 bottom
U$176  [R11]  117.73,44.83 90 bottom
U$177  [L12]  117.73,42.29 90 bottom
U$178  [21]  112.27,50.67 90 bottom
U$179  [1_1]  109.73,50.8 90 bottom
U$180  [TRIGGER5]  107.31,50.16 90 bottom
U$181  [GND0]  121.54,56.39 0 bottom
U$182  [PHONES0]  119.51,42.42 90 bottom
U$183  [SPEAKER1]  119.63,34.8 90 bottom
U$184  [QWIIC-LOGO-MEDIUM]  121.16,28.45 0 bottom
U$185  SPARKX-LOGO4  [SPARKX-MEDIUM]  18.16,94.87 0 bottom
U$186  SPARKX-LOGO3  [SPARKX-SMALL]  23.62,65.53 0 top
U$187  [3#3V2]  19.81,59.82 90 top
U$188  [GND1]  17.27,59.82 90 top
U$189  [SCL9]  24.89,59.82 90 top
U$190  [SDA8]  22.35,59.82 90 top
U$191  [GND1]  17.27,59.82 90 bottom
U$192  [3#3V2]  19.81,59.82 90 bottom
U$193  [SDA8]  22.35,59.82 90 bottom
U$194  [SCL9]  24.89,59.82 90 bottom
U$195  [I_SUPER2_C-()-03]  31.12,71.5 0 top
U$196  [INT#-[<]  27.43,59.69 90 top
U$197  [INT#-[<]  27.43,59.69 90 bottom
U$198  [RST#-[>]  29.97,59.69 90 top
U$199  [RST#-[>]  29.97,59.69 90 bottom
U$200  [PWR-()-03]  31.75,86.23 0 top
U$201  [ADR-()-03]  25.78,83.57 0 top
U$202  [TRIGGER5]  17.27,101.47 90 top
U$203  [21]  22.35,101.98 90 top
U$204  [32]  24.89,101.98 90 top
U$205  [43]  27.43,102.11 90 top
U$206  [#5]  25.91,91.31 90 top
U$207  [#6]  25.78,85.34 90 top
U$208  [1_1]  19.81,102.11 90 top
U$209  [GND0]  28.07,107.7 0 top
U$210  [L12]  27.81,93.6 90 top
U$211  [R11]  27.81,96.14 90 top
U$212  [#6]  27.56,98.42 90 top
U$213  [PHONES0]  24.13,93.98 90 top
U$214  [SPEAKER1]  11.3,83.57 0 top
U$215  [QWIIC_MP32]  15.75,71.76 0 top
U$216  [QWIIC_MP32]  26.42,99.95 0 bottom
U$217  [#6]  28.32,87 90 bottom
U$218  [#5]  28.07,89.66 90 bottom
U$219  [43]  27.43,102.11 90 bottom
U$220  [32]  24.89,101.98 90 bottom
U$221  [#6]  28.07,98.42 90 bottom
U$222  [R11]  27.81,96.14 90 bottom
U$223  [L12]  27.81,93.6 90 bottom
U$224  [21]  22.35,101.98 90 bottom
U$225  [1_1]  19.81,102.11 90 bottom
U$226  [TRIGGER5]  17.4,101.47 90 bottom
U$227  [GND0]  31.62,107.7 0 bottom
U$228  [PHONES0]  29.59,93.73 90 bottom
U$229  [SPEAKER1]  29.72,86.11 90 bottom
U$230  [QWIIC-LOGO-MEDIUM]  31.24,79.76 0 bottom
U$231  SPARKX-LOGO4  [SPARKX-MEDIUM]  48.13,94.87 0 bottom
U$232  SPARKX-LOGO3  [SPARKX-SMALL]  53.59,65.53 0 top
U$233  [3#3V2]  49.78,59.82 90 top
U$234  [GND1]  47.24,59.82 90 top
U$235  [SCL9]  54.86,59.82 90 top
U$236  [SDA8]  52.32,59.82 90 top
U$237  [GND1]  47.24,59.82 90 bottom
U$238  [3#3V2]  49.78,59.82 90 bottom
U$239  [SDA8]  52.32,59.82 90 bottom
U$240  [SCL9]  54.86,59.82 90 bottom
U$241  [I_SUPER2_C-()-03]  61.09,71.5 0 top
U$242  [INT#-[<]  57.4,59.69 90 top
U$243  [INT#-[<]  57.4,59.69 90 bottom
U$244  [RST#-[>]  59.94,59.69 90 top
U$245  [RST#-[>]  59.94,59.69 90 bottom
U$246  [PWR-()-03]  61.72,86.23 0 top
U$247  [ADR-()-03]  55.75,83.57 0 top
U$248  [TRIGGER5]  47.24,101.47 90 top
U$249  [21]  52.32,101.98 90 top
U$250  [32]  54.86,101.98 90 top
U$251  [43]  57.4,102.11 90 top
U$252  [#5]  55.88,91.31 90 top
U$253  [#6]  55.75,85.34 90 top
U$254  [1_1]  49.78,102.11 90 top
U$255  [GND0]  58.04,107.7 0 top
U$256  [L12]  57.78,93.6 90 top
U$257  [R11]  57.78,96.14 90 top
U$258  [#6]  57.53,98.42 90 top
U$259  [PHONES0]  54.1,93.98 90 top
U$260  [SPEAKER1]  41.28,83.57 0 top
U$261  [QWIIC_MP32]  45.72,71.76 0 top
U$262  [QWIIC_MP32]  56.39,99.95 0 bottom
U$263  [#6]  58.29,87 90 bottom
U$264  [#5]  58.04,89.66 90 bottom
U$265  [43]  57.4,102.11 90 bottom
U$266  [32]  54.86,101.98 90 bottom
U$267  [#6]  58.04,98.42 90 bottom
U$268  [R11]  57.78,96.14 90 bottom
U$269  [L12]  57.78,93.6 90 bottom
U$270  [21]  52.32,101.98 90 bottom
U$271  [1_1]  49.78,102.11 90 bottom
U$272  [TRIGGER5]  47.37,101.47 90 bottom
U$273  [GND0]  61.59,107.7 0 bottom
U$274  [PHONES0]  59.56,93.73 90 bottom
U$275  [SPEAKER1]  59.69,86.11 90 bottom
U$276  [QWIIC-LOGO-MEDIUM]  61.21,79.76 0 bottom
U$277  SPARKX-LOGO4  [SPARKX-MEDIUM]  78.11,94.87 0 bottom
U$278  SPARKX-LOGO3  [SPARKX-SMALL]  83.57,65.53 0 top
U$279  [3#3V2]  79.76,59.82 90 top
U$280  [GND1]  77.22,59.82 90 top
U$281  [SCL9]  84.84,59.82 90 top
U$282  [SDA8]  82.3,59.82 90 top
U$283  [GND1]  77.22,59.82 90 bottom
U$284  [3#3V2]  79.76,59.82 90 bottom
U$285  [SDA8]  82.3,59.82 90 bottom
U$286  [SCL9]  84.84,59.82 90 bottom
U$287  [I_SUPER2_C-()-03]  91.06,71.5 0 top
U$288  [INT#-[<]  87.38,59.69 90 top
U$289  [INT#-[<]  87.38,59.69 90 bottom
U$290  [RST#-[>]  89.92,59.69 90 top
U$291  [RST#-[>]  89.92,59.69 90 bottom
U$292  [PWR-()-03]  91.69,86.23 0 top
U$293  [ADR-()-03]  85.72,83.57 0 top
U$294  [TRIGGER5]  77.22,101.47 90 top
U$295  [21]  82.3,101.98 90 top
U$296  [32]  84.84,101.98 90 top
U$297  [43]  87.38,102.11 90 top
U$298  [#5]  85.85,91.31 90 top
U$299  [#6]  85.72,85.34 90 top
U$300  [1_1]  79.76,102.11 90 top
U$301  [GND0]  88.01,107.7 0 top
U$302  [L12]  87.76,93.6 90 top
U$303  [R11]  87.76,96.14 90 top
U$304  [#6]  87.5,98.42 90 top
U$305  [PHONES0]  84.07,93.98 90 top
U$306  [SPEAKER1]  71.25,83.57 0 top
U$307  [QWIIC_MP32]  75.69,71.76 0 top
U$308  [QWIIC_MP32]  86.36,99.95 0 bottom
U$309  [#6]  88.27,87 90 bottom
U$310  [#5]  88.01,89.66 90 bottom
U$311  [43]  87.38,102.11 90 bottom
U$312  [32]  84.84,101.98 90 bottom
U$313  [#6]  88.01,98.42 90 bottom
U$314  [R11]  87.76,96.14 90 bottom
U$315  [L12]  87.76,93.6 90 bottom
U$316  [21]  82.3,101.98 90 bottom
U$317  [1_1]  79.76,102.11 90 bottom
U$318  [TRIGGER5]  77.34,101.47 90 bottom
U$319  [GND0]  91.57,107.7 0 bottom
U$320  [PHONES0]  89.53,93.73 90 bottom
U$321  [SPEAKER1]  89.66,86.11 90 bottom
U$322  [QWIIC-LOGO-MEDIUM]  91.19,79.76 0 bottom
U$323  SPARKX-LOGO4  [SPARKX-MEDIUM]  108.08,94.87 0 bottom
U$324  SPARKX-LOGO3  [SPARKX-SMALL]  113.54,65.53 0 top
U$325  [3#3V2]  109.73,59.82 90 top
U$326  [GND1]  107.19,59.82 90 top
U$327  [SCL9]  114.81,59.82 90 top
U$328  [SDA8]  112.27,59.82 90 top
U$329  [GND1]  107.19,59.82 90 bottom
U$330  [3#3V2]  109.73,59.82 90 bottom
U$331  [SDA8]  112.27,59.82 90 bottom
U$332  [SCL9]  114.81,59.82 90 bottom
U$333  [I_SUPER2_C-()-03]  121.03,71.5 0 top
U$334  [INT#-[<]  117.35,59.69 90 top
U$335  [INT#-[<]  117.35,59.69 90 bottom
U$336  [RST#-[>]  119.89,59.69 90 top
U$337  [RST#-[>]  119.89,59.69 90 bottom
U$338  [PWR-()-03]  121.67,86.23 0 top
U$339  [ADR-()-03]  115.7,83.57 0 top
U$340  [TRIGGER5]  107.19,101.47 90 top
U$341  [21]  112.27,101.98 90 top
U$342  [32]  114.81,101.98 90 top
U$343  [43]  117.35,102.11 90 top
U$344  [#5]  115.82,91.31 90 top
U$345  [#6]  115.7,85.34 90 top
U$346  [1_1]  109.73,102.11 90 top
U$347  [GND0]  117.98,107.7 0 top
U$348  [L12]  117.73,93.6 90 top
U$349  [R11]  117.73,96.14 90 top
U$350  [#6]  117.47,98.42 90 top
U$351  [PHONES0]  114.05,93.98 90 top
U$352  [SPEAKER1]  101.22,83.57 0 top
U$353  [QWIIC_MP32]  105.66,71.76 0 top
U$354  [QWIIC_MP32]  116.33,99.95 0 bottom
U$355  [#6]  118.24,87 90 bottom
U$356  [#5]  117.98,89.66 90 bottom
U$357  [43]  117.35,102.11 90 bottom
U$358  [32]  114.81,101.98 90 bottom
U$359  [#6]  117.98,98.42 90 bottom
U$360  [R11]  117.73,96.14 90 bottom
U$361  [L12]  117.73,93.6 90 bottom
U$362  [21]  112.27,101.98 90 bottom
U$363  [1_1]  109.73,102.11 90 bottom
U$364  [TRIGGER5]  107.31,101.47 90 bottom
U$365  [GND0]  121.54,107.7 0 bottom
U$366  [PHONES0]  119.51,93.73 90 bottom
U$367  [SPEAKER1]  119.63,86.11 90 bottom
U$368  [QWIIC-LOGO-MEDIUM]  121.16,79.76 0 bottom

## Library data of the parts
C1 C3 C6 C11 C18 C19 C22 C28 C29 C32 C38 C39 C42 C48 C49 C52 C58 C59 C62 C68 C69 C72 C78 C79 = SparkFun-Capacitors; PROD_ID: CAP-11015
C2 C7 C8 C10 C13 C14 C21 C24 C25 C31 C34 C35 C41 C44 C45 C51 C54 C55 C61 C64 C65 C71 C74 C75 = SparkFun-Capacitors; PROD_ID: CAP-00810
C4 C5 C9 C12 C15-C17 C20 C23 C26 C27 C30 C33 C36 C37 C40 C43 C46 C47 C50 C53 C56 C57 C60 C63 C66 C67 C70 C73 C76 C77 C80 = SparkFun-Capacitors; PROD_ID: CAP-00868
D1-D8 = SparkFun-LED; PROD_ID: DIO-00819
E$1-E$4 LOGO1-LOGO8 = SparkFun-Aesthetics
E$5 E$6 = SparkFun-Retired
J1 J21 J33 J45 J57 J69 J81 J93 = SparkFun-Connectors; PROD_ID: CONN-07820
J2 J4 J13 J15 J25 J27 J37 J39 J49 J51 J61 J63 J73 J75 J85 J87 = SparkFun-Connectors; PROD_ID: CONN-13694
J3 J14 J26 J38 J50 J62 J74 J86 U$1 U$2 U$30 U$48 U$93 U$94 U$139 U$140 U$185 U$186 U$231 U$232 U$277 U$278 U$323 U$324 = SparkX
J5 J7 J10 J16 J17 J22 J28 J29 J34 J40 J41 J46 J52 J53 J58 J64 J65 J70 J76 J77 J82 J88 J89 J94 JP10 JP12 JP19 JP20 JP31 JP32 JP43 JP44 JP55 JP56 JP67 JP68 JP79 JP80 JP91 JP92 = SparkFun-Connectors
J6 J18 J30 J42 J54 J66 J78 J90 = SparkFun-Connectors; PROD_ID: CONN-13711
J8 J24 J36 J48 J60 J72 J84 J96 = SparkFun-Connectors; PROD_ID: CONN-10676; SF_ID: PRT-12639
J9 J23 J35 J47 J59 J71 J83 J95 = SparkFun-Connectors; PROD_ID: CONN-13512
J11 J12 J19 J20 J31 J32 J43 J44 J55 J56 J67 J68 J79 J80 J91 J92 = SparkFun-Connectors; PROD_ID: CONN-09696
JP1-JP6 JP8 JP11 JP13-JP18 JP23-JP30 JP35-JP42 JP47-JP54 JP59-JP66 JP71-JP78 JP83-JP90 JP95 JP96 = SparkFun
JP7 JP9 JP21 JP22 JP33 JP34 JP45 JP46 JP57 JP58 JP69 JP70 JP81 JP82 JP93 JP94 = SparkFun-Jumpers
R1 R5 R9 R10 R15 R17 R19 R20 R25 R27 R29 R30 R35 R37 R39 R40 R45 R47 R49 R50 R55 R57 R59 R60 R65 R67 R69 R70 R75 R77 R79 R80 = SparkFun-Resistors; PROD_ID: RES-00824
R2 R4 R6 R12 R13 R18 R22 R23 R28 R32 R33 R38 R42 R43 R48 R52 R53 R58 R62 R63 R68 R72 R73 R78 = SparkFun-Resistors; PROD_ID: RES-08272
R3 R7 R21 R31 R41 R51 R61 R71 = SparkFun-Resistors; PROD_ID: RES-07856
R8 R14 R24 R34 R44 R54 R64 R74 = SparkFun-Resistors; PROD_ID: RES-07857
R11 R16 R26 R36 R46 R56 R66 R76 = SparkFun-Resistors; PROD_ID: RES-07828; VALUE: 4.7k
U1 U6 U10 U14 U18 U22 U26 U30 = SparkFun-IC-Amplifiers; PROD_ID: IC-10975
U2 U5 U9 U13 U17 U21 U25 U29 = WT2003S
U3 U8 U12 U16 U20 U24 U28 U32 = SparkFun-PowerIC; PROD_ID: VREG-12457
U4 U7 U11 U15 U19 U23 U27 U31 = SparkFun-IC-Microcontroller; PROD_ID: IC-11285
U$3-U$6 U$21 U$22 U$26 U$27 U$49-U$56 U$95-U$102 U$141-U$148 U$187-U$194 U$233-U$240 U$279-U$286 U$325-U$332 = Labels-0_04
U$7-U$9 U$11 U$16-U$18 U$47 U$57-U$63 U$92 U$103-U$109 U$138 U$149-U$155 U$184 U$195-U$201 U$230 U$241-U$247 U$276 U$287-U$293 U$322 U$333-U$339 U$368 = Labels
U$10 U$12 U$13 U$19 U$25 U$28 U$35 U$37-U$39 U$41 U$43 U$44 U$46 U$68-U$74 U$79 U$80 U$83-U$85 U$87 U$89 U$114-U$120 U$125 U$126 U$129-U$131 U$133 U$135 U$160-U$166 U$171 U$172 U$175-U$177 U$179 U$181 U$206-U$212 U$217 U$218 U$221-U$223 U$225 U$227 U$252-U$258 U$263 U$264 U$267-U$269 U$271 U$273 U$298-U$304 U$309 U$310 U$313-U$315 U$317 U$319 U$344-U$350 U$355 U$356 U$359-U$361 U$363 U$365 = buzzard_labels (16)
U$14 U$15 U$20 U$23 U$24 U$40 U$75-U$78 U$90 U$91 U$121-U$124 U$136 U$137 U$167-U$170 U$182 U$183 U$213-U$216 U$228 U$229 U$259-U$262 U$274 U$275 U$305-U$308 U$320 U$321 U$351-U$354 U$366 U$367 = buzzard_labels (17)
U$29 U$45 U$64 U$88 U$110 U$134 U$156 U$180 U$202 U$226 U$248 U$272 U$294 U$318 U$340 U$364 = buzzard_labels (13)
U$31-U$34 U$36 U$42 U$65-U$67 U$81 U$82 U$86 U$111-U$113 U$127 U$128 U$132 U$157-U$159 U$173 U$174 U$178 U$203-U$205 U$219 U$220 U$224 U$249-U$251 U$265 U$266 U$270 U$295-U$297 U$311 U$312 U$316 U$341-U$343 U$357 U$358 U$362 = buzzard_labels (14)